# Altium PCB X_TRACK V3.1.PcbDoc (part 2 of 2)
Units mm, origin at the board's own origin, x right, y up, seen from the top; angles counter-clockwise.
Board outline 74 x 42.6 mm, 2 copper layers (Top Layer, Bottom Layer), stack 1.571 mm thick; 150 components, 90 nets, 449 pads, 235 vias.
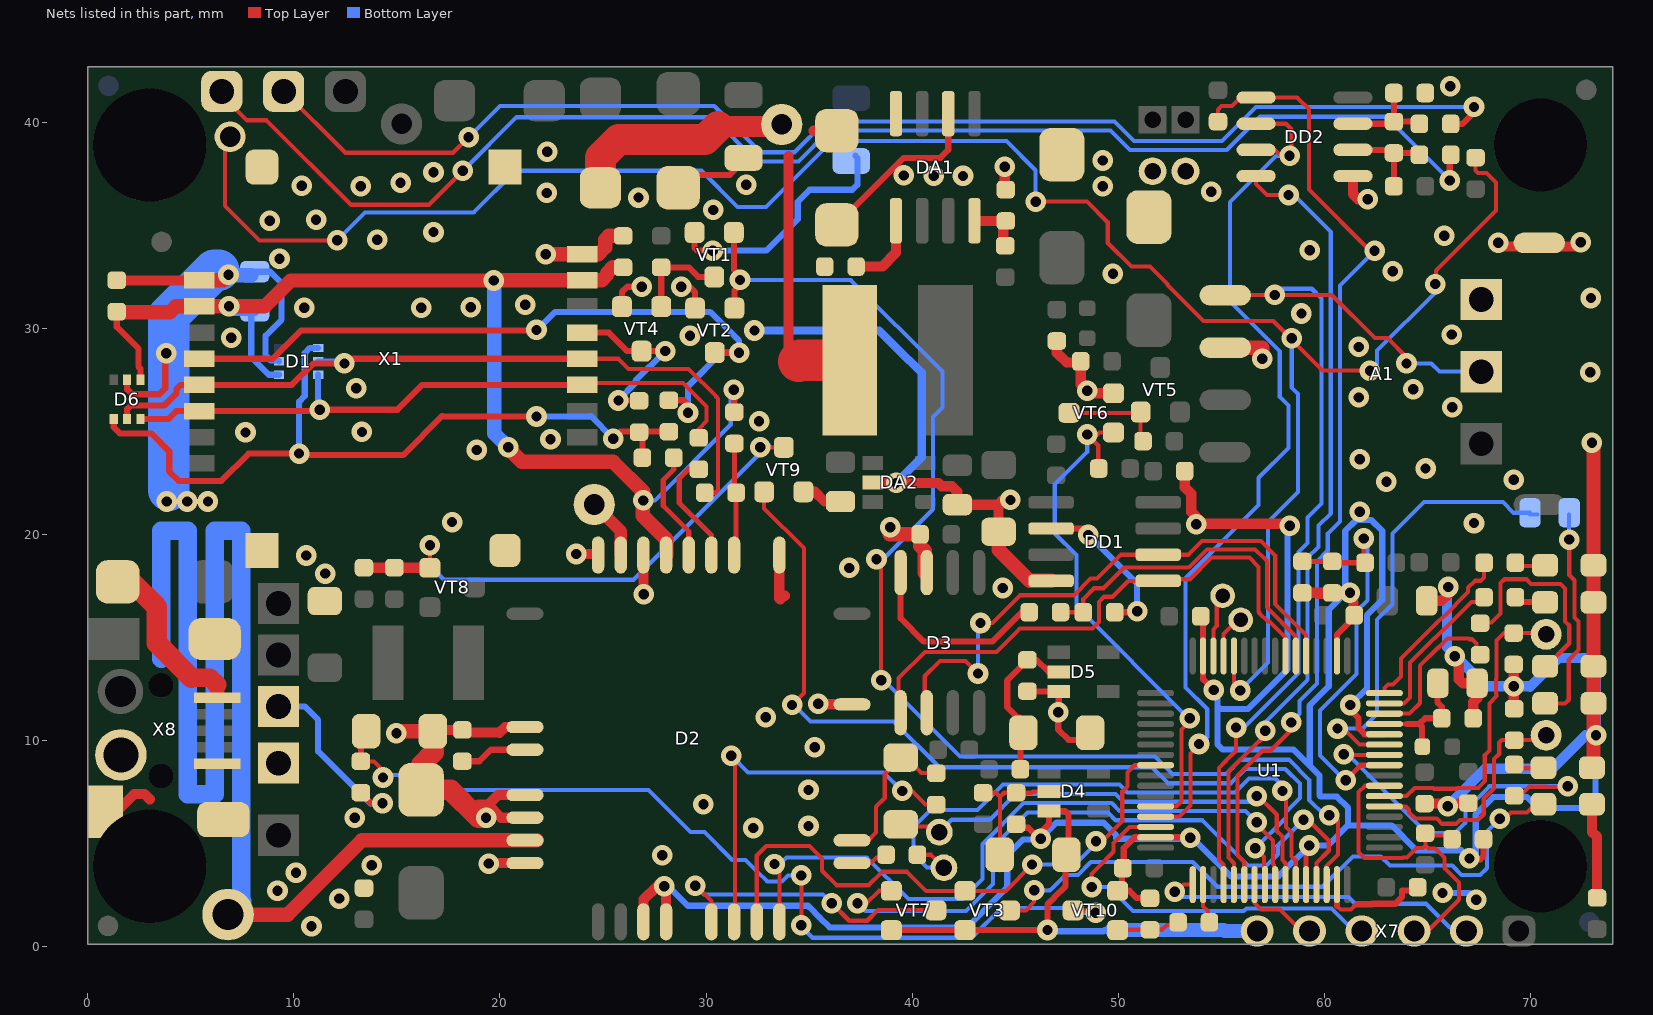
[diagram p2: the nets of this part, all layers, seen from the top]

## Via types
v1: diameter 1, hole 0.5, Top Layer to Bottom Layer, tented both sides, 235 vias

## Nets (pads, with @x,y where several pads share a name; then routed paths per layer and width w, separated by ;. In a path a pad name is that pad's centre, name@x,y a point inside that pad or via, vN(x,y) a via of type N, cw(c..) or ccw(c..) an arc to the next point about the centre after c; other vN are vias at no path point) (continued)
GND: A1.3 A1.12 C1.2 C2.2 C3.2 C4.1 C5.2 C6.2 C7.1 C9.1 C10.1 C11.1 C12.1 C13.1 C14.1 C15.1 C16.1 C17.1 C18.1 C19.1 C20.1 C22.1 C23.1 C24.1 C25.2 C26.1 C27.2 C28.1 C29.2 C30.1 C31.2 C32.1 D1.2 D2.8 D2.13 D2.19 D2.21 D2.27 D2.30 D2.31 D2.33 D2.36 D2.37 D3.7 D4.3 D5.3 D6.2 DA1.6 DA2.2 DD1.4 DD2.5 R26.1 R28.1 R31.1 R34.1 R35.1 R36.1 R40.2 U1.12 U1.18 U1.31 U1.47 U1.60 U1.63 VD2.2 VD3.2 VD4.2 VD5.2 VD6.2 VD9.1 VD11.1 VD12.1 VD15.1 VD16.1 VD17.1 VD18.1 VT1.2 VT2.2 VT3.2 VT4.2 VT6.2 VT7.2 VT9.2 VT10.2 X1.5 X1.13 X1.17 X1.18 X1.19 X1.20 X2.1 X7.6 X8.5 X8.6 X8.8 X8.9 X10.1 X16.1 | length 366.6
  Top Layer w0.2: 60.625,1.964 60.789,1.8 61.311,1.8 61.561,2.05 61.632,2.05
  Top Layer w0.25: U1.60@59.125,3 59.125,4.925 59.15,4.9 v1(59.275,4.9)
  Top Layer w0.3: D6.2@1.9,27.5 1.9,27.05 2.15,26.8 3.466,26.8 3.75,27.084 3.75,28.75 v1(3.8,28.8) ; VT4.2@25.922,31.055 25.922,31.773 26.175,32.025 v1(26.875,32.025) ; VD9.1@28.575,37.45 31.15,37.45 C24.1@31.775,38.075 ; v1(28.8,32.025) 29.2,32.025 29.472,31.753 VT2.2@29.472,30.98 ; VT1.2@29.447,34.655 29.447,33.903 29.575,33.775 v1(30.325,33.775) ; VD11.1@36.35,35.025 39.6,38.275 41.375,38.275 41.76,38.66 DA1.6@41.76,40.425 DA1.6@41.76,40.875 ; VT7.2@38.995,0.798 38.998,0.8 v1(46.575,0.8) 46.575,2.042 46.906,2.373 46.906,2.381 47.45,2.925 47.45,4.512 47.6,4.662 47.6,6.4 47.425,6.575 D4.3@46.65,6.575 46.65,5.95 46.252,5.552 v1(46.252,5.225) ; R34.1@45.05,5.763 45.642,5.763 v1@46.252,5.152 ; R35.1@45.6,12.388 45.613,12.375 D5.3@47.125,12.375 47.125,11.475 47.025,11.375 v1(47.1,11.375) 47.1,10.525 47.6,10.025 VD17.1@48.569,10.025 ; R36.1@51.55,2.337 51.537,2.35 50.9,2.35 50.547,2.703 VT10.2@49.98,2.703 49.979,2.88 50.188,3.088 50.188,3.75 50.277,3.839 50.277,4.777 50.8,5.3 U1.47@51.825,5.3 v1@53.275,5.3 ; C20.1@54.012,16.025 54.125,15.912 U1.31@54.125,14.1 54.125,12.975 v1(54.649,12.45) ; 60.625,1.964 U1.63@60.625,2.825 ; U1.18@60.625,14.1 60.625,15.138 C18.1@61.412,15.925 ; v1(61.275,11.721) 61.275,11.475 61.675,11.075 61.675,10.593 61.968,10.3 U1.12@62.925,10.3 ; 61.632,2.05 62.325,2.05 62.35,2.075 63.458,2.075 63.788,2.405 63.788,2.725 64.487,2.725 64.487,2.825 C19.1@64.537,2.875 ; v1(67.053,4.275) 67.526,4.275 67.576,4.226 67.737,4.387 C11.1@67.737,5.2
  Top Layer w0.5: X8.8@0.86,6.538 1.388,6.538 2.25,7.4 2.75,7.4 3,7.15 ; C32.1@1.4,32.337 1.409,32.328 5.398,32.328 X1.13@5.405,32.335 ; VD18.1@16.744,10.45 16.744,10.125 16.775,10.094 17.193,10.512 C3.2@18.175,10.512 18.3,10.387 19.963,10.387 19.975,10.375 20.25,10.65 D2.27@21.213,10.65 ; 18.95,6.875 19.425,6.875 ; v1(19.45,4.025) 19.475,4.05 D2.33@21.213,4.05 ; D2.31@21.213,6.25 20.05,6.25 19.425,6.875 ; D2.30@21.213,7.35 19.9,7.35 19.425,6.875 ; v1(23.7,19.05) 24.712,19.05 D2.21@24.762,19 ; D2.36@26.963,1.2 26.963,2.263 27.625,2.925 v1(27.975,2.925) 28.063,2.838 D2.37@28.063,1.2 ; D2.19@26.962,19 26.962,16.888 26.975,16.875 v1(26.975,17.1) ; D2.13@33.562,19 33.562,16.887 33.6,16.85 33.775,17.025 33.825,17.025 ; VT9.2@34.727,22.071 35.279,22.071 35.752,21.598 C22.1@36.525,21.598 ; v1(35.45,11.775) 35.35,11.775 35.375,11.75 D2.8@37.088,11.75 ; DA2.2@38.1,22.525 39.2,22.525 v1(39.225,22.5) 41.27,22.5 41.434,22.336 41.939,22.336 42.2,22.075 C28.1@42.2,21.448 44.177,21.448 44.2,21.47 ; VD12.1@44.2,20.131 44.2,21.47 ; v1(44.5,37.85) 44.5,36.787 R28.1@44.55,36.737 ; v1(44.775,21.675) 44.405,21.675 44.2,21.47 ; C29.2@47.028,29.388 47.028,28.816 47.5,28.343 48.131,28.343 C4.1@48.188,28.4 48.188,27.287 48.622,26.853 VT6.2@49.779,26.853 ; C15.1@53.237,23.075 53.237,22.287 53.55,21.974 53.55,21.1 54.075,20.575 54.075,20.525 58.229,20.525 v1(58.328,20.426) ; R26.1@58.95,17.163 C26.1@60.4,17.163 ; 59.7,17.125 61.35,17.125 61.299,17.176 v1(61.253,17.176) ; DD2.5@61.4,37.395 61.4,36.536 61.661,36.275 v1(62.125,36.275) ; C18.1@61.412,15.925 61.425,15.938 61.425,16.7 ; C30.1@64.875,6.938 65.876,6.938 v1(66.008,6.806) ; C16.1@64.978,16.775 65.7,16.775 66.025,17.1 v1(66.025,17.45) ; v1@66.539,13.939 66.539,12.975 66.739,12.775 C10.1@67.427,12.775 67.427,12.053 67.237,11.862 C9.1@67.237,11.075 ; R31.1@66.564,6.963 R31.1@67,6.963 ; v1(68.45,34.15) 68.625,33.975 72.445,33.975 72.645,34.175 v1(72.45,34.175) ; 69.2,12.012 v1(69.2,12.625) 69.2,13.663 69.175,13.688 C13.1@69.2,13.688
  Top Layer w0.7: X1.13@5.405,32.335 6.56,32.335 v1(6.825,32.6) ; v1(14.975,10.35) 15.075,10.45 VD18.1@16.744,10.45 ; v1(22.225,33.6) X1.5@23.995,33.6 ; X1.5@23.995,33.605 24.78,33.605 25.1,33.925 25.1,34.3 25.287,34.487 C2.2@25.975,34.487 ; v1(38.95,20.35) 38.95,20.04 38.91,20 C14.1@40.388,20 40.388,19.437 40.615,19.21 D3.7@40.615,18.15 ; VD12.1@44.2,20.131 44.2,19.25 45.705,17.745 DD1.4@46.75,17.745 ; A1.3@55.205,29.07 57.005,29.07 57,29.065 v1(57,28.525) ; VD5.2@73,8.65 73.075,8.725 VD2.2@73.075,11.8 VD3.2@73.075,13.6 VD4.2@73.075,16.7 VD6.2@73.075,18.5 73.075,24.375 v1(73,24.45)
  Top Layer w1: VD18.1@16.744,10.125 VD18.1@16.744,10.45 ; VD18.1@16.775,10.094 16.775,9.425 16.175,8.825 C6.2@16.175,7.6 17.6,7.6 18.95,6.25 v1(19.325,6.25)
  Bottom Layer w0.3: C1.2@8.1,32.753 8.847,32.753 9.4,32.2 9.4,30.425 8.625,29.65 8.625,28.684 8.859,28.45 9.225,28.45 D1.2@9.275,28.4 ; v1(27.975,2.925) 28.175,2.925 29.125,1.975 34.954,1.975 35.025,1.904 35.025,1.9 35.527,1.398 36,0.925 42.686,0.925 44.625,2.864 44.625,4.425 45.4,5.2 46.2,5.2 v1@46.225,5.225 ; v1(30.325,33.775) 32.925,33.775 34.45,35.3 34.45,36.15 35.025,36.725 37.1,36.725 37.35,36.975 37.35,38.276 C23.1@37.25,38.376 ; v1(46.252,5.225) v1@46.225,5.225 ; v1(46.575,0.8) 46.638,0.737 49.281,0.737 49.345,0.8 49.7,0.8 ; v1(54.649,12.45) 54.828,12.271 54.828,11.65 ; v1(58.328,20.426) 58.225,20.323 58.225,13.45 56.301,11.526 54.952,11.526 54.828,11.65 ; v1(61.275,11.721) 62.075,12.521 62.075,16.068 62.825,16.818 62.825,20.173 62.298,20.7 61.552,20.7 61.025,20.173 61.025,17.404 v1(61.253,17.176) 61.149,17.176 60.974,17.001 60.925,17.05 60.225,16.35 60.225,12.625 59.3,11.7 59.3,8.774 ; v1(65.75,2.6) 67.053,2.6 v1(67.378,2.275) ; v1@66.954,4.375 66.654,4.675 64.475,4.675 63.272,5.878 61.153,5.878 ; v1@67.358,4.534 67.358,6.408 68.2,7.25 69.85,7.25 70.375,6.725 72.55,6.725 73.175,7.35 73.175,10.225 v1(73.2,10.25) ; v1@46.225,5.225 47.005,6.005 49.3,6.005 49.902,5.403 49.902,5.248 49.925,5.225 53.45,5.225 v1(53.5,5.275) 53.6,5.275 55.475,3.4 57.775,3.4 v1(59.275,4.9) 60.175,4.9 61.153,5.878 ; 54.828,11.65 54.828,9.803 55.065,9.566 58.508,9.566 59.3,8.774 ; 59.3,8.774 59.778,8.296 59.778,7.322 59.825,7.275 60.626,7.275 61.153,6.748 61.153,5.878
  Bottom Layer w0.4: v1(32.35,29.9) 38.4,29.9 39.875,28.425 39.893,28.425 40.475,27.844 40.475,23.75 v1(39.225,22.5)
  Bottom Layer w0.5: 65.964,14.514 65.964,17.389 v1(66.025,17.45) ; v1@66.007,6.807 67.825,8.625 71.075,8.625 72.7,10.25 v1(73.2,10.25) 73.2,13.75 72.946,14.004 71.396,14.004 69.993,12.6 69.968,12.625 v1(69.2,12.625) 67.904,12.625 67.879,12.6 66.341,14.138 v1(66.341,14.093)
  Bottom Layer w0.7: v1(6.825,32.6) 6.838,32.587 C1.2@7.925,32.587 ; 49.7,0.8 55.125,0.8 55.175,0.75 X7.6@56.75,0.75
  Bottom Layer w2: X16.1@1.6,9.3 X16.1@1.823,9.3 ; 3.925,22.125 3.925,30.625 6.125,32.825 6.35,32.825
  other v1: 10.85,0.975 12.2,2.325 9.2,2.7 10.1,3.575 13.775,3.95 27.875,4.425 32.3,5.75 34.975,5.85 12.95,6.25 29.875,6.9 34.975,7.6 35.275,9.675 32.9,11.125 44.4,17.4 11.525,18.1 36.95,18.375 10.6,18.975 53.8,20.5 67.275,20.55 17.675,20.6 61.725,21.1 3.825,21.6 4.825,21.6 5.825,21.6 63.025,22.55 69.2,22.65 64.925,23.2 61.725,23.65 18.875,24.1 22.45,24.625 7.65,24.95 13.3,24.975 32.575,25.5 66.225,26.175 61.675,26.65 48.502,26.976 64.325,27.05 13.025,27.1 72.925,27.875 61.675,29.1 6.95,29.55 29.225,29.65 66.2,29.7 58.9,30.725 10.5,31 16.175,31 18.575,31.025 21.225,31.15 72.95,31.475 49.75,32.65 63.325,32.775 9.3,33.375 59.3,33.8 14.05,34.3 65.825,34.5 16.775,34.675 8.825,35.225 11.075,35.275 30.35,35.75 26.725,36.35 22.275,36.575 54.525,36.625 13.25,36.9 49.25,36.9 10.375,36.925 31.95,36.975 15.175,37.075 41.05,37.4 42.475,37.4 39.6,37.425 16.775,37.575 49.25,38.15 22.3,38.575 66.125,41.75
GPS_POW_ON/OFF: R8.1 U1.44 VT6.1 | length 25.9
  Top Layer w0.2: R8.1@49.038,23.25 49.038,24.312 48.502,24.848 v1(48.502,24.851) 48.856,24.851 48.88,24.875 48.952,24.802 49.1,24.95 49.1,24.948 VT6.1@49.779,24.948 ; U1.44@51.825,6.8 52.825,6.8 53.075,7.05 53.075,10.525 53.478,10.928 v1(53.478,11.076)
  Bottom Layer w0.2: v1(48.502,24.851) 48.502,24.002 46.925,22.425 46.925,20.056 47.975,19.006 47.975,16.528 53.428,11.076 v1(53.478,11.076)
GPS_RX: A1.2 U1.52 X21.1 | length 48
  Top Layer w0.2: U1.52@55.125,3 55.125,3.975 54.903,4.197 54.903,8.668 55.225,8.991 55.225,8.998 55.728,9.501 v1(55.728,10.626) ; A1.2@55.205,31.61 55.372,31.777 55.873,31.275 56.223,31.625 v1(57.6,31.625) 60.373,31.625 62.473,29.525 63.075,29.525 64,28.6 v1(64,28.3)
  Bottom Layer w0.2: v1(55.728,10.626) 56.108,10.626 56.278,10.796 56.508,11.026 58.75,13.268 58.75,19.144 58.806,19.2 58.808,19.2 59.192,19.583 59.192,20.817 59.875,21.5 59.875,31.45 59.4,31.925 57.9,31.925 v1(57.6,31.625) ; v1(64,28.3) 65.2,28.3 65.6,27.9 X21.1@67.625,27.9
LED_BLUE_GPS: R22.1 U1.16 | length 8.7
  Top Layer w0.2: U1.16@62.925,12.3 62.925,12.55 63.1,12.725 63.35,12.725 63.725,13.1 63.725,13.971 65.469,15.715 65.488,15.715 65.774,16.001 65.789,16.001 66.988,17.199 66.988,17.42 67.318,17.75 67.6,17.75 67.763,17.913 R22.1@67.763,18.625
LED_NETLIGHT: VD7.2 VT3.3 | length 31.1
  Top Layer w0.2: VT3.3@44.729,1.75 45.525,1.75 45.927,2.152 v1(45.927,2.725) ; v1@68.675,6.1 69.075,6.5 69.85,6.5 70.25,6.9 VD7.2@70.65,6.9
  Bottom Layer w0.2: v1(45.927,2.725) 46.65,2.725 46.675,2.75 46.7,2.725 47.45,3.475 48.05,3.475 48.675,4.1 53.625,4.1 54.825,2.9 59.925,2.9 61.4,4.375 62.75,4.375 63.2,3.925 66.219,3.925 66.669,3.475 67.577,3.475 67.9,3.798 67.9,4.852 67.878,4.874 67.878,5.553 v1(68.525,6.2)
LED_ORANGE_RS485: R20.1 U1.15 | length 7.9
  Top Layer w0.2: U1.15@62.925,11.8 63.882,11.8 64.175,12.093 64.175,13.784 65.341,14.95 65.359,14.95 65.802,15.393 65.818,15.393 67.15,16.725 R20.1@67.763,16.725
LED_RED_GSM1: R21.1 U1.10 | length 18.5
  Top Layer w0.2: v1(60.95,9.325) 60.975,9.3 U1.10@62.925,9.3 ; R21.1@69.3,7.113 69.937,7.75 70.806,7.75 ; 70.806,7.75 71.8,7.75 v1(71.825,7.775)
  Bottom Layer w0.2: v1(60.95,9.325) 61.15,9.325 64.975,5.5 66.35,5.5 66.858,6.008 66.858,6.615 68.018,7.775 v1(71.825,7.775)
LED_WHITE_SERVER: R18.1 U1.14 | length 7.7
  Top Layer w0.2: U1.14@62.925,11.3 64.15,11.3 64.655,11.806 64.655,13.628 65.527,14.5 65.546,14.5 65.989,14.943 67.024,14.943 67.055,14.912 67.188,14.912 67.4,14.7 R18.1@67.4,14.163
LED_YELLOW_GPRS: R17.1 U1.11 | length 21.8
  Top Layer w0.2: v1(60.653,10.576) 60.949,10.576 61.725,9.8 U1.11@62.925,9.8
  Bottom Layer w0.2: v1(60.653,10.576) 61.875,10.576 62.575,11.276 62.575,15.861 63.325,16.611 63.325,20.05 64.85,21.575 68.675,21.575 69.2,21.05 R17.1@69.997,21.05 ; R17.1@69.997,20.975 R17.1@70.363,20.975
MOD_POW: U1.56 VT9.1 | length 44.1
  Top Layer w0.2: VT9.1@32.822,22.071 32.822,21.259 34.75,19.332 34.75,12.299 v1(34.177,11.726) ; v1(56.653,4.775) 57.075,4.353 57.075,3.05 U1.56@57.125,3
  Bottom Layer w0.2: v1@34.274,11.726 35.075,10.925 39.1,10.925 41.325,8.7 51.65,8.7 52.425,7.925 55.489,7.925 56.18,8.616 58.114,8.616 58.828,7.902 58.828,7.198 58.153,6.523 58.153,6.248 56.68,4.775 v1(56.653,4.775)
MOD_RX: U1.58 VD1.2 X6.1 | length 23.5
  Top Layer w0.2: VD1.2@39.325,5.831 41.044,5.831 X6.1@41.325,5.55 ; v1(56.728,7.3) 56.728,7.329 56.75,7.35 57.703,6.397 57.703,5.612 57.975,5.34 57.975,4.189 58.125,4.039 U1.58@58.125,3
  Bottom Layer w0.2: X6.1@41.325,5.55 41.925,6.15 43.775,6.15 45.03,7.405 49.88,7.405 50.26,7.025 56.452,7.025 v1(56.728,7.3)
MOD_STATUS: D2.42 U1.57 | length 34
  Top Layer w0.2: v1(33.327,4) 33.563,3.764 D2.42@33.563,1.2 ; v1(56.728,6.025) 56.75,6.025 56.75,5.929 57.525,5.153 57.525,4.002 57.575,3.952 57.575,3 U1.57@57.625,3
  Bottom Layer w0.2: v1(33.327,4) 33.575,4 33.9,4.325 37.8,4.325 39.825,2.3 42.45,2.3 43.427,3.277 43.427,4.963 45.419,6.955 49.694,6.955 50.074,6.575 56.178,6.575 v1(56.728,6.025)
MOD_TX: R11.1 U1.59 X5.1 | length 30.3
  Top Layer w0.2: R11.1@40.262,4.45 40.925,4.45 X5.1@41.55,3.825 ; X5.1@41.025,3.85 X5.1@41.55,3.325 ; v1@57.825,7.297 v1@58.003,7.475 ; v1(57.978,7.55) 57.978,7.5 v1@58.003,7.475 ; U1.59@58.625,3 58.625,4.175 58.425,4.375 58.425,5.526 58.153,5.798 58.153,7.625 v1@58.003,7.475
  Bottom Layer w0.2: X5.1@41.55,3.825 40.725,3.825 40.075,4.475 40.075,5.8 40.9,6.625 43.179,6.625 44.409,7.855 50.066,7.855 50.447,7.475 55.675,7.475 56.351,8.15 57.628,8.15 57.9,7.878 57.9,7.673 58.003,7.57 57.983,7.55 v1(57.978,7.55)
MSPI_MISO: R14.1 R19.1 U1.22 | length 17.1
  Top Layer w0.2: R19.1@47.212,16.225 R14.1@48.313,16.225 48.313,16.863 48.837,17.388 49.287,17.388 50.3,18.4 53.434,18.4 54.309,19.275 56.65,19.275 57.1,18.825 57.225,18.7 57.225,16.452 58.625,15.052 U1.22@58.625,14.1
MSPI_MOSI: D3.1 DD1.5 U1.23 | length 27.2
  Top Layer w0.2: D3.1@39.345,11.35 39.352,11.357 39.352,13.027 40.625,14.3 44.106,14.3 45.231,15.425 48.758,15.425 49.075,15.742 49.075,16.725 49.325,16.975 49.725,16.975 50.495,17.745 DD1.5@51.95,17.745 52.03,17.825 53.495,17.825 54.545,18.875 56.377,18.875 56.825,18.427 56.825,16.248 56.85,16.223 56.85,16.191 57.276,15.765 57.346,15.765 58.125,14.986 U1.23@58.125,14.1
MSPI_SCK: D3.2 DD1.6 U1.21 | length 29.6
  Top Layer w0.2: D3.2@40.615,11.35 40.615,13.115 41.35,13.85 42.6,13.85 v1(43.2,13.25) ; v1(43.325,15.7) 43.902,15.7 45.247,17.045 47.859,17.045 48.666,17.852 48.973,17.852 50.136,19.015 DD1.6@51.95,19.015 53.412,19.015 54.072,19.675 56.928,19.675 57.628,18.975 57.628,16.615 59.125,15.118 U1.21@59.125,14.1
  Bottom Layer w0.2: v1(43.2,13.25) 43.2,15.825 43.325,15.95 v1(43.325,15.7)
NetC3_1: C3.1 D2.28 | length 3.3
  Top Layer w0.3: C3.1@18.175,8.988 19,8.988 19.562,9.55 D2.28@21.213,9.55
NetC8_1: C8.1 R12.1 VT8.1 VT9.3 | length 26.5
  Top Layer w0.2: VT8.1@16.595,18.378 16.6,18.382 v1(16.6,19.475) ; v1(32.627,24.226) 33.772,24.226 VT9.3@33.775,24.23
  Top Layer w0.5: C8.1@13.4,18.387 R12.1@14.875,18.387 16.586,18.387 VT8.1@16.595,18.378
  Bottom Layer w0.2: v1(16.6,19.475) 16.6,18.475 17.275,17.8 26.473,17.8 v1@32.899,24.226 ; v1(32.627,24.226) v1@32.899,24.226 ; v1@32.899,24.226 33.052,24.226 33.1,24.275 33.024,24.351 v1@32.899,24.226
NetC9_2: C9.2 C10.2 L2.2 U1.13 | length 5.9
  Top Layer w0.2: U1.13@62.925,10.8 64,10.8
  Top Layer w0.3: 64,10.8 64.625,10.8 ; L2.2@64.75,9.7 64.75,10.675 64.625,10.8 ; C10.2@65.522,12.775 65.5,12.753 65.5,11.848 65.713,11.635 C9.2@65.713,11.075 64.9,11.075 64.625,10.8
NetC12_2: C12.2 U1.5 Y1.2 | length 11.7
  Top Layer w0.2: U1.5@62.925,6.8 63.975,6.8 63.975,6.786 64.125,6.636 64.125,6.513 64.425,6.213 65.469,6.213 65.727,5.956 66.405,5.956 66.593,6.143 67.475,6.143 67.75,6.418 67.75,7.175 68.25,7.675 68.25,9.1 68.5,9.35 68.5,9.9 68.613,10.013 C12.2@69.225,10.013 70.013,10.013 70.25,10.25 Y1.2@70.775,10.25
NetC13_2: C13.2 U1.6 Y1.1 | length 14.9
  Top Layer w0.2: U1.6@62.925,7.3 64,7.3 64.4,7.7 65.288,7.7 65.332,7.656 66.431,7.656 66.475,7.7 67.492,7.7 ; 67.492,7.717 67.8,8.025 67.8,9.295 68.025,9.52 68.025,11.802 68.375,12.152 68.375,12.248 68.35,12.273 68.35,12.977 68.375,13.002 68.375,14.85 68.737,15.212 70.713,15.212 Y1.1@70.775,15.15
NetC21_1: C21.1 DA1.1 | length 3.8
  Top Layer w0.5: C21.1@37.287,33 38.55,33 39.22,33.67 DA1.1@39.22,35.225
NetC21_2: C21.2 DA1.8 L3.1 VD11.2 | length 13.8
  Top Layer w0.5: 34,38.361 34,28.9 34.5,28.4 ; 35.236,39.597 VD11.2@36.35,39.597
  Top Layer w2: 34.5,28.4 34.55,28.45 L3.1@36.975,28.45
NetD2_1: D2.1 R11.2 | length 1.8
  Top Layer w0.2: D2.1@37.088,4.05 38,4.05 38.275,4.325 R11.2@38.738,4.325
NetD2_2: D2.2 R10.1 VD1.1 | length 7.4
  Top Layer w0.2: D2.2@37.088,5.15 37.875,5.15 38.26,5.535 38.26,6.785 38.675,7.2 38.675,8.369 VD1.1@39.375,9.069 ; VD1.1@39.45,9.169 39.693,9.169 40.45,8.412 R10.1@41.175,8.412 R10.1@41.225,8.412
NetD2_15: D2.15 R4.2 R6.2 | length 6
  Top Layer w0.25: D2.15@31.237,18.525 D2.15@31.237,19 ; D2.15@31.362,19 31.462,19.1 R4.2@31.462,22.025 31.375,22.112 R6.2@31.375,24.413
NetD2_16: D2.16 R5.2 | length 6
  Top Layer w0.25: R5.2@29.65,23.163 29.156,23.163 28.7,22.707 28.7,21.525 30.262,19.963 D2.16@30.262,19 ; D2.16@30.137,18.525 D2.16@30.137,19
NetD2_17: D2.17 R7.2 | length 5.9
  Top Layer w0.25: R7.2@28.437,23.725 28.437,23.151 27.925,22.639 27.925,21.387 29.162,20.149 D2.17@29.162,19 ; D2.17@29.037,18.525 D2.17@29.037,19
NetD2_20: D2.20 X4.1 | length 3
  Top Layer w0.6: X4.1@24.575,21.45 25.862,20.163 D2.20@25.862,19
NetD2_32: D2.32 X3.1 | length 71.8
  Top Layer w0.7: X3.1@6.8,1.55 9.7,1.55 13.3,5.15 D2.32@21.213,5.15 D2.32@21.775,5.15
  Bottom Layer w0.7: X3.1@6.8,1.55 7.575,1.55 X3.1@7.6,1.525
  Bottom Layer w0.9: 3.55,13.975 3.55,20.175 4.85,20.175 4.85,7.4 6.15,7.4 6.15,20.175 7.45,20.175 X3.1@7.45,2.2
  Bottom Layer w1: X3.1@6.8,1.55 X3.1@7.45,2.2
NetD2_39: D2.39 VT7.3 | length 15.7
  Top Layer w0.2: v1(29.475,2.95) 29.525,2.95 30.262,2.212 D2.39@30.262,1.2 ; D2.39@30.137,0.725 D2.39@30.137,1.2 ; v1@35.925,1.923 v1@36.097,2.096 ; v1(36.102,2.096) v1@36.097,2.096 ; VT7.3@41.154,1.75 41.13,1.775 38.35,1.775 37.825,1.25 36.952,1.25 36.102,2.1 v1@36.097,2.096
  Bottom Layer w0.2: v1(29.475,2.95) 29.9,2.525 35.677,2.525 36.102,2.1 v1@36.097,2.096 ; v1@35.925,1.923 v1@36.097,2.096 ; v1(36.102,2.096) v1@36.097,2.096
NetD3_8: D3.8 R19.2 | length 9.6
  Top Layer w0.3: D3.8@39.445,18.15 39.445,15.93 40.575,14.8 43.899,14.8 45.324,16.225 R19.2@45.688,16.225 ; R19.2@45.663,15.975 R19.2@45.688,15.95
NetD4_2: D4.2 R34.2 R38.2 VD16.2 | length 7
  Top Layer w0.2: R38.2@43.45,7.462 44.075,7.462 44.275,7.262 ; VD16.2@44.256,3.7 44.275,3.719 44.275,7.262 ; D4.2@46.65,7.525 45.875,7.525 45.812,7.462 R34.2@45.05,7.462 44.475,7.462 44.275,7.262
NetD5_2: D5.2 R35.2 R39.2 VD17.2 | length 8
  Top Layer w0.3: R39.2@45.262,8.6 45.262,10.231 VD17.2@45.331,10.3 ; VD17.2@45.406,10.375 VD17.2@45.331,10.3 ; D5.2@47.125,13.325 46.625,13.325 46.038,13.912 R35.2@45.6,13.912 45.6,13.891 44.625,12.916 44.625,11.622 45.134,11.113 45.225,11.113 45.331,11.007 VD17.2@45.331,10.3
NetDA1_4: DA1.4 R28.2 R29.1 | length 2.8
  Top Layer w0.5: DA1.4@43.03,35.225 43.042,35.213 R28.2@44.55,35.213 44.425,35.088 R29.1@44.425,34.012
NetDD1_2: DD1.2 R14.2 | length 7.5
  Top Layer w0.3: DD1.2@46.75,20.285 v1@48.465,20.285 ; R14.2@49.837,16.225 50.875,16.225 v1(50.925,16.275)
  Bottom Layer w0.3: v1(48.55,19.975) 50.925,17.6 v1(50.925,16.275)
NetDD2_6: DD2.6 R41.1 R42.2 R45.2 | length 4.9
  Top Layer w0.3: DD2.6@61.4,38.665 63.235,38.665 R41.1@63.387,38.513 ; R42.2@63.388,36.9 63.388,38.512 R41.1@63.387,38.513 ; R45.2@64.625,38.425 64.537,38.513 R41.1@63.387,38.513
NetDD2_7: DD2.7 R40.1 R41.2 R43.2 | length 4.7
  Top Layer w0.3: DD2.7@61.4,39.935 63.285,39.935 R41.2@63.387,40.037 ; R40.1@63.388,41.425 R40.1@63.388,41.425 R41.2@63.387,40.037 ; R43.2@64.625,39.925 64.513,40.037 R41.2@63.387,40.037
NETLIGHT: D2.41 U1.40 VT3.1 | length 28.8
  Top Layer w0.2: D2.41@32.337,0.725 D2.41@32.337,1.2 ; D2.41@32.463,1.2 32.463,4.413 32.925,4.875 35.025,4.875 35.625,4.275 35.625,3.675 36.325,2.975 37.9,2.975 38.55,3.625 39.751,3.625 40.676,2.7 44.552,2.7 v1(45.827,3.975) ; v1@49.075,4.95 50.205,6.081 50.205,7.53 50.45,7.775 50.45,8.439 50.811,8.8 U1.40@51.825,8.8
  Bottom Layer w0.2: v1(45.827,3.975) 47.914,3.975 48.927,4.989 v1(48.927,5.105)
NetR1_2: R1.2 VT1.3 VT4.1 | length 4.7
  Top Layer w0.3: VT4.1@27.827,31.055 27.827,32.961 R1.2@27.825,32.963 29.16,32.963 29.627,32.496 VT1.3@30.4,32.496
NetR2_1: R2.1 VT2.3 X1.10 | length 35.4
  Top Layer w0.3: X1.10@5.405,28.525 8.975,28.525 10.35,29.9 21.8,29.9 v1(21.775,29.925) ; R2.1@28.2,26.512 28.913,26.512 29.176,26.249 29.126,26.199 v1(29.126,25.901) ; VT2.3@30.425,28.821 v1(31.604,28.821)
  Bottom Layer w0.3: v1(21.775,29.925) 21.8,29.925 22.675,30.8 30.2,30.8 31.604,29.396 v1(31.604,28.821) 30.746,28.821 29.126,27.201 v1(29.126,25.901)
NetR3_1: R3.1 VT4.3 X1.2 | length 8.3
  Top Layer w0.3: X1.2@23.995,29.795 25.28,29.795 26.179,28.896 VT4.3@26.875,28.896 28.021,28.896 v1(28.025,28.9) ; v1(25.75,26.5) R3.1@26.303,26.5
  Bottom Layer w0.3: v1(25.75,26.5) 25.75,26.522 26.626,27.399 26.575,27.45 v1(28.025,28.9)
NetR9_1: R9.1 VT5.1 VT6.3 | length 5
  Top Layer w0.2: VT6.3@47.62,25.9 VT5.1@51.098,25.9 ; VT5.1@51.098,25.946 VT5.1@51.098,25.9 ; R9.1@51.238,24.525 51.098,24.666 VT5.1@51.098,25.9
NetR17_2: R17.2 VD2.1 | length 10.3
  Top Layer w0.2: VD2.1@70.725,11.8 71.7,11.8 71.875,11.975 71.875,13.909 72.35,14.384 72.35,15.775 72.15,15.975 72.15,17.775 71.9,18.025 v1@71.9,19.475
  Bottom Layer w0.2: R17.2@71.887,20.975 71.887,19.763 v1(71.9,19.75)
NetR18_2: R18.2 VD3.1 | length 10.6
  Top Layer w0.2: VD3.1@70.725,13.6 70.781,13.6 71.9,14.719 71.9,15.581 71.7,15.781 71.7,17.375 71.475,17.6 70.05,17.6 69.825,17.825 68.75,17.825 68.562,17.637 68.562,16.162 68.125,15.725 67.563,15.725 R18.2@67.525,15.687 ; R18.2@67.525,15.687 67.6,15.687 R18.2@67.575,15.687 R18.2@67.525,15.687
NetR20_2: R20.2 VD4.1 | length 1.4
  Top Layer w0.3: R20.2@69.287,16.725 VD4.1@70.725,16.725
NetR21_2: R21.2 VD5.1 | length 1.4
  Top Layer w0.2: R21.2@69.3,8.637 69.313,8.65 VD5.1@70.65,8.65
NetR22_2: R22.2 VD6.1 | length 1.4
  Top Layer w0.2: R22.2@69.312,18.475 VD6.1@70.725,18.475
NetR23_1: R23.1 VD7.1 | length 4.9
  Top Layer w0.3: R23.1@73.1,2.475 R23.1@73.25,2.625
  Top Layer w0.5: VD7.1@73.075,6.9 73,6.825 73,5.575 73.25,5.325 73.25,2.625 R23.1@73.25,2.362
NetR24_2: R24.2 VD8.1 | length 10.9
  Top Layer w1: 30.573,39.8 33.575,39.8 R24.2@33.675,39.9
  Top Layer w1.5: VD8.1@24.875,36.825 24.875,38.3 25.75,39.175 29.948,39.175 30.573,39.8
NetR33_2: R33.2 R36.2 VT10.1 | length 3.2
  Top Layer w0.2: VT10.1@49.98,0.623 50.17,0.813 R36.2@51.55,0.813 52.138,0.813 52.375,1.05 52.788,1.05 R33.2@52.913,1.175
NetR43_1: R43.1 X13.1 | length 64.2
  Top Layer w0.2: X13.1@9.5,41.525 12.5,38.525 17.725,38.525 v1(18.475,39.275)
  Top Layer w0.3: R43.1@66.149,39.925 66.725,39.925 67.275,40.475 v1(67.275,40.75)
  Bottom Layer w0.2: v1(18.475,39.275) 20,40.8 30.4,40.8 32.65,38.55 34.294,38.55 35.794,40.05 49.824,40.05 50.774,39.1 50.989,39.1 55.05,39.1 56.7,40.75 v1(67.275,40.75)
NetR44_1: R44.1 X17.1 | length 9.2
  Top Layer w0.3: R44.1@13.25,7.463 13.763,6.95 v1(14.3,6.95)
  Bottom Layer w0.3: X17.1@9.25,11.65 10.525,11.65 11.175,11 11.175,9.475 13.7,6.95 v1(14.3,6.95)
NetR44_2: R44.2 VD18.2 VT10.3 | length 45.4
  Top Layer w0.2: R44.2@13.25,8.987 13.888,8.987 14.325,8.55 v1(14.325,8.2) ; VD18.2@13.506,10.125 VD18.2@13.525,10.106 ; v1(34.625,3.45) 34.627,3.448 v1(34.627,1.025) ; VT10.3@47.821,1.75 48.4,1.75 48.702,1.448 48.891,1.637 v1(48.909,1.637)
  Top Layer w0.3: R44.2@13.25,8.987 13.25,10.194 VD18.2@13.506,10.45
  Bottom Layer w0.2: v1(14.325,8.2) v1@14.325,8.325 ; v1(34.625,3.45) 33.978,3.45 33.679,3.15 32.975,3.15 32.477,3.648 31.925,4.2 31.275,4.2 29.925,5.55 29.25,5.55 27.2,7.6 15.8,7.6 15.075,8.325 v1@14.325,8.325 ; v1(34.627,1.025) 34.627,0.973 35.175,0.425 42.893,0.425 44.343,1.875 45.575,1.875 46.279,1.875 ; 46.279,1.875 47.827,1.875 48.066,1.637 v1(48.909,1.637) ; v1@14.325,8.325 14.15,8.325 14.3,8.475 14.325,8.45 v1@14.325,8.325
NetR45_1: R45.1 X14.1 | length 68.9
  Top Layer w0.2: X14.1@6.35,41.475 7.725,40.1 8.675,40.1 12.775,36 16.55,36 v1(18.2,37.65)
  Top Layer w0.3: v1(66.103,37.177) 66.103,38.379 R45.1@66.149,38.425
  Bottom Layer w0.2: v1(18.2,37.65) 20.8,40.25 30.314,40.25 32.464,38.1 34.481,38.1 35.981,39.6 49.638,39.6 50.588,38.65 51.175,38.65 55.275,38.65 56.9,40.275 63.005,40.275 v1(66.103,37.177)
NetU1_29: U1.29 X25.1 | length 2.5
  Top Layer w0.2: U1.29@55.125,14.1 55.125,15.175 55.975,16.025 X25.1@55.975,16.275
NetU1_30: U1.30 X26.1 | length 3.5
  Top Layer w0.2: U1.30@54.625,14.1 54.625,15.393 54.787,15.555 54.787,17.137 X26.1@55.075,17.425
NetVD20_1: VD20.1 X8.1 | length 8.5
  Top Layer w0.7: X8.1@6.275,12.175 6.275,12.7
  Top Layer w0.9: 5.047,13.05 5.925,13.05 6.275,12.7
  Top Layer w1: VD20.1@1.45,17.7 2.125,17.7 3.35,16.475 3.35,14.713 5.013,13.05 5.047,13.05
NRST: C11.2 R13.1 U1.7 X7.3 | length 16.9
  Top Layer w0.2: U1.7@62.925,7.8 61.977,7.8 61.675,7.498 61.675,4.593 61.968,4.3 63.797,4.3 63.822,4.325 64.025,4.325 64.475,4.775 64.8,4.775 64.925,4.9 ; X7.3@63.895,0.85 64.27,1.225 X7.3@64.37,1.225 ; X7.3@64.37,0.75 65.031,0.75 66.55,2.269 66.55,3.1 65.85,3.8 65.85,4.308 65.395,4.763 65.062,4.763 64.925,4.9 ; R13.1@64.9,5.487 65,5.387 R13.1@65.05,5.387 ; R13.1@65.075,5.362 R13.1@65.05,5.387 ; C11.2@66.213,5.15 65.976,5.387 R13.1@65.05,5.387 ; 64.925,4.9 64.925,5.262 R13.1@65.05,5.387
ONE_WIRE: R37.1 U1.28 X20.1 | length 102.4
  Top Layer w0.2: X20.1@6.65,39.2 6.65,35.95 8.325,34.275 v1(12.1,34.275) ; v1(46,36.15) 48.5,36.15 49.5,35.15 49.5,34.15 50.65,33 51.55,33 52.4,32.15 52.4,32.102 54.152,30.35 57.531,30.35 59.931,27.95 v1(62.225,27.95) ; v1@55.625,12.725 U1.28@55.625,14.1 ; v1(65.4,32.15) 65.425,32.175 65.425,32.8 68.35,35.725 68.35,37.075 67.887,37.538 67.475,37.538 67.35,37.663 R37.1@67.35,38.287
  Bottom Layer w0.2: v1(12.1,34.275) 13.45,35.625 18.725,35.625 20.75,37.65 29.775,37.65 31.525,35.9 32.917,35.9 36.118,39.101 44.576,39.101 46,37.677 v1(46,36.15) ; v1(55.927,12.427) 57.275,13.775 57.275,20.6 58.725,22.05 58.725,26.825 58.428,27.122 v1(58.428,29.526) ; v1(62.225,27.95) 62.575,28.3 62.575,28.923 65.4,31.748 v1(65.4,32.15)
OUT_1_MCU: R33.1 U1.50 | length 2
  Top Layer w0.2: U1.50@54.125,3 54.125,1.95 54.362,1.713 54.362,1.25 R33.1@54.437,1.175
POWER_KEY: U1.61 VT7.1 | length 33
  Top Layer w0.2: v1(37.352,2.1) 37.8,2.1 38.403,2.703 VT7.1@38.995,2.703 ; v1(59.003,6.15) 59.227,6.15 60.225,5.152 60.225,4.648 59.625,4.048 U1.61@59.625,3
  Bottom Layer w0.2: v1(37.352,2.1) 37.727,1.725 42.625,1.725 43.925,3.025 43.925,4.825 45.605,6.505 49.507,6.505 49.888,6.125 54.101,6.125 56.301,3.925 57.2,3.925 57.75,4.475 57.75,4.847 57.725,4.872 v1(59.003,6.15)
RS485_RX: DD2.4 U1.53 | length 39.2
  Top Layer w0.2: U1.53@55.625,3 55.625,4.041 55.353,4.313 55.353,8.482 55.675,8.804 55.675,8.811 56.814,9.95 56.85,9.95 56.928,10.028 56.928,10.603 57.065,10.466 v1(57.15,10.466) ; DD2.4@56.7,37.395 56.7,37.01 57.235,36.475 v1(58.275,36.475)
  Bottom Layer w0.2: v1(57.15,10.466) 57.15,10.849 57.128,10.871 59.2,12.944 59.2,18.874 59.725,19.399 59.725,20.425 60.325,21.025 60.325,34.68 58.53,36.475 v1(58.275,36.475)
RS485_TE: DD2.2 DD2.3 U1.45 | length 43.9
  Top Layer w0.2: U1.45@51.825,6.3 52.975,6.3 53.525,6.85 53.525,9.373 53.928,9.776 v1(53.928,9.826) ; DD2.3@56.7,38.665 57.61,38.665 57.9,38.375 v1(58.325,38.375) ; DD2.2@56.7,39.935 58.14,39.935 58.41,39.665 v1@58.41,38.4
  Bottom Layer w0.2: v1(53.928,9.826) 53.978,9.826 54.328,10.175 54.328,11.519 53.275,12.572 53.275,17.873 56.825,21.423 56.825,22.75 58.275,24.2 58.275,26.25 57.85,26.675 57.85,28.877 55.425,31.302 55.425,36.125 57.675,38.375 v1(58.325,38.375)
RS485_TX: DD2.1 R32.1 U1.54 | length 47.6
  Top Layer w0.2: R32.1@54.85,40.038 54.85,40.612 55.025,40.787 55.537,40.787 55.955,41.205 DD2.1@56.7,41.205 58.695,41.205 59.26,40.64 59.26,36.742 v1@62.339,33.664 ; U1.54@56.125,3 56.125,4.106 55.803,4.429 55.803,8.296 56.125,8.618 56.125,8.625 57,9.5 57.404,9.5 58.4,10.496 v1(58.4,10.875)
  Bottom Layer w0.2: v1(58.4,10.875) 58.8,11.275 58.8,11.907 59.65,12.757 59.65,18.687 60.175,19.212 60.175,20.03 60.775,20.63 60.775,32.075 62.45,33.75 v1(62.45,33.775)
SC: D1.6 D6.6 R5.1 X1.3 X1.11 | length 32.1
  Top Layer w0.2: X1.3@23.995,27.255 24.09,27.35 28.88,27.35 30.026,26.203 30.026,25.499 29.65,25.123 R5.1@29.65,24.687
  Top Layer w0.3: D6.6@2.55,25.6 3.9,25.6 4.285,25.985 X1.11@5.405,25.985 11.185,25.985 v1(11.25,26.05) 15.025,26.05 16.23,27.255 X1.3@23.995,27.255
  Bottom Layer w0.3: D1.6@11.175,27.75 11.175,26.125 v1(11.25,26.05)
SD: D1.5 D6.5 R4.1 X1.7 X1.15 | length 37.5
  Top Layer w0.2: X1.7@23.995,28.525 25.75,28.525 26.239,28.036 29.151,28.036 30.5,26.686 30.5,26.673 30.575,26.598 30.575,22.15 30.45,22.025 R4.1@29.938,22.025
  Top Layer w0.3: D6.5@1.9,25.6 1.9,26.075 2.075,26.25 3.693,26.25 4.3,26.856 4.3,27.055 4.5,27.255 X1.15@5.405,27.255 9.905,27.255 10.95,28.3 v1(12.45,28.3) 12.675,28.525 X1.7@23.995,28.525
  Bottom Layer w0.3: D1.5@11.175,28.4 12.35,28.4 v1(12.45,28.3)
SIM_SELECT: U1.62 VT1.1 VT2.1 | length 60.8
  Top Layer w0.2: v1(38.502,12.926) v1@38.502,18.573 ; U1.62@60.125,3 60.125,3.912 60.675,4.462 v1@60.675,6.125
  Top Layer w0.3: VT2.1@31.352,31.005 VT2.1@31.377,30.98 31.377,31.832 31.652,32.107 v1(31.652,32.352) 31.652,32.548 31.352,32.848 VT1.1@31.352,34.655
  Bottom Layer w0.2: v1(31.652,32.352) 37.023,32.352 41.475,27.9 41.475,26.159 41.025,25.709 41.025,21.223 38.603,18.801 v1(38.277,18.801) ; v1(38.502,12.926) 38.615,12.926 42.325,9.216 51.8,9.216 52.641,8.375 55.25,8.375 55.941,9.066 58.301,9.066 59.278,8.089 59.278,7.115 60.018,6.375 v1(60.253,6.375)
SR: D1.4 D6.4 R2.2 R3.2 R7.1 | length 38
  Top Layer w0.3: D6.4@1.25,25.6 1.25,25.2 1.55,24.9 3.075,24.9 3.95,24.025 3.95,23.05 4.4,22.6 6.475,22.6 7.8,23.925 v1(10.25,23.925) 10.325,23.85 15.3,23.85 17.2,25.75 17.225,25.725 v1(21.775,25.725) ; v1(25.5,24.65) 25.838,24.988 R2.2@28.2,24.988 ; R3.2@26.75,24.963 26.913,24.8 R7.1@26.913,23.725
  Bottom Layer w0.3: v1(10.25,23.925) 10.25,26.45 10.525,26.725 10.525,28.8 10.775,29.05 D1.4@11.175,29.05 ; v1(21.775,25.725) 24.375,25.725 24.4,25.75 v1(25.5,24.65)
SVDD: C1.1 C2.1 C32.2 D1.1 D2.18 D6.1 R6.1 X1.1 X1.9 | length 63
  Top Layer w0.3: C32.2@1.4,30.813 1.4,30.075 2.45,29.025 2.45,28.15 2.55,28.05 D6.1@2.55,27.5 ; v1(31.35,27.025) 31.375,27 R6.1@31.375,25.937
  Top Layer w0.7: C32.2@1.4,30.813 1.425,30.788 3.988,30.788 4.265,31.065 X1.9@5.405,31.065 8.59,31.065 9.85,32.325 v1(19.7,32.325) 19.7,32.25 19.785,32.335 X1.1@23.995,32.335 24.935,32.335 25.194,32.594 25.194,32.676 25.482,32.963 C2.1@25.975,32.963 ; v1(20.4,24.225) 20.35,24.225 21.05,23.525 25.489,23.525 26.95,22.064 v1(26.95,21.65) ; v1@26.925,21.575 26.925,20.91 28.062,19.773 D2.18@28.062,19
  Bottom Layer w0.2: v1(26.95,21.65) 27.525,21.65 31.2,25.325 31.2,27.1 31.275,27.025 v1(31.35,27.025)
  Bottom Layer w0.3: C1.1@8.1,30.848 7.925,30.673 7.925,28.6 8.775,27.75 D1.1@9.275,27.75
  Bottom Layer w0.5: v1(6.85,31.075) 7.077,30.848 C1.1@8.1,30.848
  Bottom Layer w0.7: v1(19.7,32.325) 19.725,32.3 19.725,24.9 v1(20.4,24.225)
SWCLK: U1.49 X7.2 | length 15.9
  Top Layer w0.2: v1(52.753,2.65) v1@52.825,2.65 ; v1@52.825,2.65 53.175,3 U1.49@53.625,3
  Bottom Layer w0.2: v1(52.753,2.65) 53.003,2.4 61.175,2.4 61.5,2.075 64.95,2.075 66.1,0.925 X7.2@66.935,0.925
SWDIO: U1.46 X7.4 | length 18.5
  Top Layer w0.2: v1(48.72,2.887) 48.72,3.505 48.725,3.51 48.72,3.516 48.725,3.521 48.719,3.527 49.396,4.204 ; 49.39,4.21 49.777,4.598 49.777,5.016 50.561,5.8 U1.46@51.825,5.8
  Bottom Layer w0.2: v1(48.72,2.887) 49.539,2.887 49.553,2.9 50.728,1.725 56.1,1.725 56.225,1.85 60.355,1.85 X7.4@61.355,0.85
SWO: U1.55 X7.5 | length 3.6
  Top Layer w0.2: U1.55@56.625,3 56.625,2.114 56.939,1.8 57.865,1.8 X7.5@58.815,0.85
UPOW_ADC: C26.2 R25.1 R26.2 U1.9 | length 19.5
  Top Layer w0.2: v1(61.925,19.8) 61.925,18.688 R25.1@61.988,18.625
  Top Layer w0.25: R26.2@58.95,18.687 60.326,18.687 60.388,18.625 R25.1@61.988,18.625 ; v1(61.05,8.075) 61.775,8.8 U1.9@62.675,8.8
  Bottom Layer w0.2: v1(61.05,8.075) 60.998,8.075 59.8,9.273 59.8,11.448 61.575,13.223 61.575,16.275 62.103,16.803 62.103,19.622 v1(61.925,19.8)
VDD_EXT: D2.40 R10.2 | length 19.6
  Top Layer w0.2: v1(31.225,9.257) 31.401,9.08 31.401,1.239 D2.40@31.363,1.2 ; D2.40@31.237,0.725 D2.40@31.237,1.2 ; v1(39.525,7.55) 40,7.55 40.662,6.888 R10.2@41.175,6.888
  Bottom Layer w0.2: v1(31.225,9.257) 32.032,8.45 38.625,8.45 v1(39.525,7.55)
pads on no net: A1.7 D1.3 D2.12 D2.22 D4.1 D5.1 D6.3 DA1.2 DA1.3 DA1.5 DA2.4 RP1.0 RP2.0 RP3.0 RP4.0 RP5.0 RP6.0 U1.1 U1.2 U1.3 U1.4 U1.24 U1.25 U1.26 U1.27 U1.33 U1.34 U1.35 U1.36 U1.37 U1.41 U1.42 U1.43 U1.51 X1.4 X1.6 X1.8 X1.12 X1.14 X1.16 X8.2 X8.3 X8.4 X8.7 X8.10 X8.11

## Polygon pours and split planes (outlines as drawn)
+MODEM_VCC on Top Layer "+4V2_MODEM_VCC" (solid, remove dead copper, pour order 14): 13.75,0 12.975,0 12.975,2 12.825,2 12.825,2.175 12.875,2.225 14.2,2.225 14.25,2.275 14.25,3.125 14.525,3.4 19.125,3.4 20,2.525 20.5,2.525 24.375,2.525 24.5,2.65 24.5,2.825 24.5,7.15 24.5,7.4 24.25,7.65 22.5,9.4 22.5,15.65 22,16.15 18.25,16.15 17.75,16.65 17.75,18.15 18.25,18.65 18.75,18.65 19.25,18.15 22.75,18.15 24,16.9 25,15.9 25,15.4 25,11.15 26.75,9.4 26.75,3.9 26.75,3.4 26.975,0.1 26.75,0.1 26.6,0.1 24.075,0.1
+4.2VDC on Top Layer "+4.2Vdc" (solid, remove dead copper, pour order 28): 17.25,10.9 19.25,10.9 20.5,12.15 20.5,15.4 20,15.9 18.5,15.9 17.75,15.9 17.5,15.65 17.25,15.4 17,15.15 16.75,15.15 16.5,14.9 16.5,11.65
+4.2V on Top Layer "+4.2V" (solid, remove dead copper, pour order 26): 8.25,6.4 9.75,6.4 10.75,7.4 10.75,11.9 10.75,14.15 11.5,14.15 12,14.65 12,15.65 12.275,15.9 12.275,15.925 12.5,16.15 12.526,16.176 12.526,16.506 12.526,17.426 12.75,17.65 17,17.65 17.5,17.15 17.5,16.15 17.5,15.4 17.5,15.9 17,15.4 16.75,15.4 16.5,15.15 16.25,14.9 16.25,14.4 16.25,11.9 15.75,11.4 15.5,11.4 12.75,11.4 12.5,11.15 12.5,10.4 12.5,9.65 12.5,8.65 12.5,6.65 10.25,4.4 8.25,4.4
GND on Top Layer "GND_top" (solid, remove dead copper, pour order 20): 0,-0.6 74,-0.6 74,43.4 0,43.4
+3V on Top Layer "+3V" (solid, remove dead copper, pour order 10): 48.5,14.65 52.75,14.65 62,14.65 62.5,15.15 62.5,17.15 62.75,17.4 64.25,17.4 64.5,17.15 64.5,14.9 63.5,13.9 63.5,13.4 63.5,11.9 63.5,2.9 63,2.4 61.25,2.4 51.75,2.4 51.25,2.9 51.25,13.025 50.975,13.025 50.175,13.025 48.25,13.025 48.25,14.4
+4.2VDC on Top Layer "+4.2VDC" (solid, remove dead copper, pour order 8): 39,24.9 39.75,24.15 42.25,24.15 43.5,24.15 44,24.65 47.25,27.9 47.5,28.15 47.5,28.65 47.5,28.9 47.5,29.65 47.5,30.15 48.25,30.9 49,31.65 49,33.65 49,34.65 48.25,35.4 47.5,35.4 47,35.4 46.75,35.4 46.25,35.4 46,35.15 45.25,34.4 45.175,34.325 45.175,33.45 44.9,33.15 44.5,33.15 43.875,33.15 43.625,32.9 43.45,32.9 43.325,32.9 43.2,32.9 43.15,32.9 43.25,32.9 43,32.9 42.75,32.9 40.25,32.9 40,32.9 39,31.9
NetC21_2 on Top Layer "+DC/DC_SW" (solid, remove dead copper, pour order 4): 39.5,39.4 39.5,41.15 39.5,41.4 39,41.4 35.75,41.4 35,40.65 35,40.15 35,39.9 34.5,39.4 33,37.9 33,31.65 33.25,31.4 33.25,25.65 34.75,24.15 36.75,24.15 37.5,24.15 37.75,24.4 37.75,25.4 37.75,29.4 37.75,32.15 37.5,32.4 36.75,32.4 36.5,32.65 36.5,33.4 36.25,33.65 35.75,33.65 35.25,33.65 34.75,34.15 34.75,35.65 34.75,37.15 35.5,37.9 36.5,37.9 37.75,37.9 38.5,38.65 38.75,38.9 38.75,39.4
+POWER on Top Layer "+POWER_TOP" (solid, remove dead copper, pour order 0): 44.25,42.8 44.25,41.9 42.25,41.9 41.2,41.9 40.9,41.6 40.9,39.3 40.8,39.2 40.2,39.2 40.1,39.3 40.1,41.6 39.9,41.8 33.3,41.8 32.8,41.3 31.525,40.025 23.875,40.025 23.25,39.4 20.5,39.4 19.75,40.15 19.75,42.8
GND on Bottom Layer "GND_bot" (solid, remove dead copper, pour order 30): 0,0 0,42.8 74,42.8 74,41.9 74,0
+POWER on Bottom Layer "+POWER_BOT" (solid, remove dead copper, pour order 2): 54.75,43.4 54.75,39.4 54.25,38.9 51,38.9 50.5,38.9 50,39.4 49,40.4 48,40.4 42.25,40.4 35.75,40.4 35.25,40.4 35,40.65 34.275,41.375 34.25,41.4 33.25,41.4 32.75,41.4 32,41.4 23,41.4 20.125,41.4 19.75,41.775 19.75,42.8
+4.2VDC on Bottom Layer "+4V2DC" (solid, remove dead copper, pour order 12): 39.25,28.4 40.05,27.6 40.05,27.25 40.05,24.675 39.875,24.5 39.5,24.5 39.5,23.65 37.75,21.9 37.25,21.4 27.75,11.9 16.75,11.9 16.25,12.4 16.25,13.9 16.25,15.4 16.5,15.65 26.75,15.65 27,15.9 27.25,16.15 39.25,28.15 39.5,28.15
+POWER_OUT on Bottom Layer "powerout" (solid, remove dead copper, pour order 22): 16.5,40.65 17,40.65 17,41.7 17,42.6 17,42.663 16.8,42.663 11.737,42.663 11.475,42.4 11.475,40.625 11.7,40.4 12.75,40.4 13.75,40.4 14.25,40.9 14.475,41.125 14.506,41.156 15.494,41.156 15.994,41.156

## Keep-outs
Keep-Out Layer:
  lines w0.1: 0,0 0,42.8 74,42.8 74,33.4 74,26.4 74,0 0,0

## Other copper
Top Layer:
  pour cut-out: 22.5,22.9 22.5,21.15 24.25,19.4
  pour cut-out: 54.45,28.025 55.6,28.025 56.975,28.025 57.4,27.6 57.4,25.85 57.4,23.85 56.65,23.1 56.65,20.6 55.2,20.6 53.75,20.6 53.75,24.375 53.9,27.65 54.275,28.025
  pour cut-out: 19.462,8.728 20.025,8.165 20.025,7.625 22.375,7.625 22.375,13.65 22.375,16.275 22.125,16.525 20.325,16.525 20.15,16.35 20.15,13.325 20.137,10.963 20.5,11.325 19.462,10.288
  pour cut-out: 61.25,1.4 63.864,1.4 64.135,1.13 64.155,1.15 67.5,1.15 68.75,2.4 68,0.65
  pour cut-out: 0,5.4 5.013,5.4 7.75,2.663 7.75,-0.6
  pour cut-out: 8.5,10.9 8.5,8.1 8,8.1 8,17.65 8.25,17.9 10.5,17.9 11,17.4 11,12.9 10.5,12.4 9,10.9 8.75,10.9
  pour cut-out: 38.5,33.4 38.5,36.4 39,36.9 43,36.9 43.75,36.15 43.75,33.9
  pour cut-out: 42.25,39.4 42.25,38.9 42.5,38.65 43.5,38.65 43.75,38.9 43.75,40.4 44.75,41.4 44.75,42.8 44.5,42.8 44.5,41.4 44.25,41.15 42.25,41.725
  pour cut-out: 38.86,38.65 41,38.65 41.25,38.9 41.25,41.65 41,39.15
  pour cut-out: 22.825,31.825 22.825,24.1 23.075,23.85
  pour cut-out: 4.125,32.2 6.525,32.2 6.532,32.193 6.532,22.822 6.522,22.822 6.15,22.45 4.125,22.45
  pour cut-out: 29.7,2.975 29.6,2.875 28.575,2.875 28.425,2.725 28.425,2.4 28.475,0.1 29.975,0.1
  pour cut-out: 38.15,12.4 38.15,10.55 38.25,10.45 38.95,10.45 38.95,10.127 38.248,9.425 37.9,9.425 37.9,12.475
  pour cut-out: 38.75,11.225 35.875,11.225 35.875,5.125 36.15,4.85 38.75,4.85
  pour cut-out: 38.528,16.584 36.703,16.584 35.978,16.584 35.978,14.191 36.15,14.018 36.15,13.182 35.978,13.009 35.978,12.084 36.178,11.884 36.378,11.884 38.603,11.959
  pour cut-out: 27.175,18.15 27.175,17.75 27.275,17.65 33.175,17.65 33.225,17.7 33.225,20.275 30.25,20.275
  pour cut-out: 25.038,18.025 25.038,17.75 25.138,17.65 25.387,17.65 26.662,17.65 26.662,18 26.688,18.025
  pour cut-out: 53.4,33.25 53.4,34.4 53.775,34.775 56.275,34.775 56.7,34.35 56.7,30.15
  pour cut-out: 72.225,23.688 72.225,21.375 71.75,20.9 70.475,22.263 69.6,22.263 69.419,22.456 68.738,23.138 68.738,24.963 68.738,25.663 68.738,32.913 68.988,33.163 71.487,33.163 71.975,33.163 72.225,32.913
  pour cut-out: 56.5,12.7 59.9,12.7 60,12.8 60,13.1
  pour cut-out: 60.3,12.8 60.5,12.8 61.1,12.8 61.2,12.8 61.712,13.312 61.712,13.77
  pour cut-out: 51.25,12.819 52.681,12.819 53.2,12.3 53.2,11.6 53.1,11.5
  pour cut-out: 54.546,4.197 53.397,4.197 53.061,3.861 53.061,3.334
  pour cut-out: 61.5,12.4 61.7,12.4 62.1,12.8 62.6,12.8 63.4,13.6 63.1,12.725 62.187,12.313
Bottom Layer:
  pour cut-out: 0,14.15 3,14.15 3.5,13.65 3.5,12.725 3.55,12.675 3.5,12.625 3.5,11.2 3,10.7 0,10.7 0,10.4
  pour cut-out: 66.2,23.125 66.7,22.625 69.2,22.625 69.7,23.125 69.7,30.375 69.2,30.875 66.7,30.875 66.2,30.375
  pour cut-out: 64,1.15 67.5,1.15 67.75,0.9
  pour cut-out: 0,6.4 5,6.4 6.25,5.15 6.25,4.128 7.75,2.628 7.75,-0.6
  pour cut-out: 2.886,21.099 8.75,21.1 8.75,0 0,0 0,21.1

## Silkscreen, mask and mechanical layers (free items; w line width, h text height)
Bottom Solder:
  circle w0.2: c5.05,24.225 r2.025
  text "A" at 5.2,41.5 h1
  text "B" at 9.85,39.175 h1
  text "+" at 12.75,39.125 h1
  text "1W" at 7.45,36.85 h1
  text "GND" at 72,30.85 h1
  text "RX" at 71.375,27.425 h1
  text "+" at 70.9,23.925 h1
  text "GDi" at 6.55,23.675 h1.3
  text "In2" at 7.525,16.15 h1
  text "+" at 1.425,13.9 h1
  text "In1" at 7.525,13.525 h1
  text "OUT" at 7.5,11.15 h1
  text "-B" at 7.425,8.625 h1
  text "-" at 1.5,6.8 h1
  text "+B" at 7.45,6.225 h1
Mechanical 1:
  lines w0: 5.75,3.9 5.775,3.875 5.775,2.675 5.775,40.3
  lines w0.1: -3,-3.6 -3,46.4 77,46.4 77,-3.6 -3,-3.6 ; -1,-1.6 -1,44.4 75,44.4 75,-1.6 -1,-1.6

## Dimensions
0,42.8 to 0,0 on Mechanical 15
0,42.8 to 74,42.8 on Mechanical 15

## Text inside footprints (layer, text, board x,y; h text height)
C25: Mechanical 13 "+" at 52.525,42.075 h1.5 r90; Bottom Overlay "+" at 52.4,42.2 h1.5 r90
C31: Mechanical 13 "+" at 54.15,42.1 h1.5 r90; Bottom Overlay "+" at 54.05,42.2 h1.5 r90